# Altium PCB PCB_HCNR201_Linearity Analog Optocouplers.PcbDoc
Units mil, origin at the board's own origin, x right, y up, seen from the top; angles counter-clockwise.
Board outline not stored, 2 copper layers (Top Layer, Bottom Layer); 20 components, 0 nets, 76 pads, 6 vias.
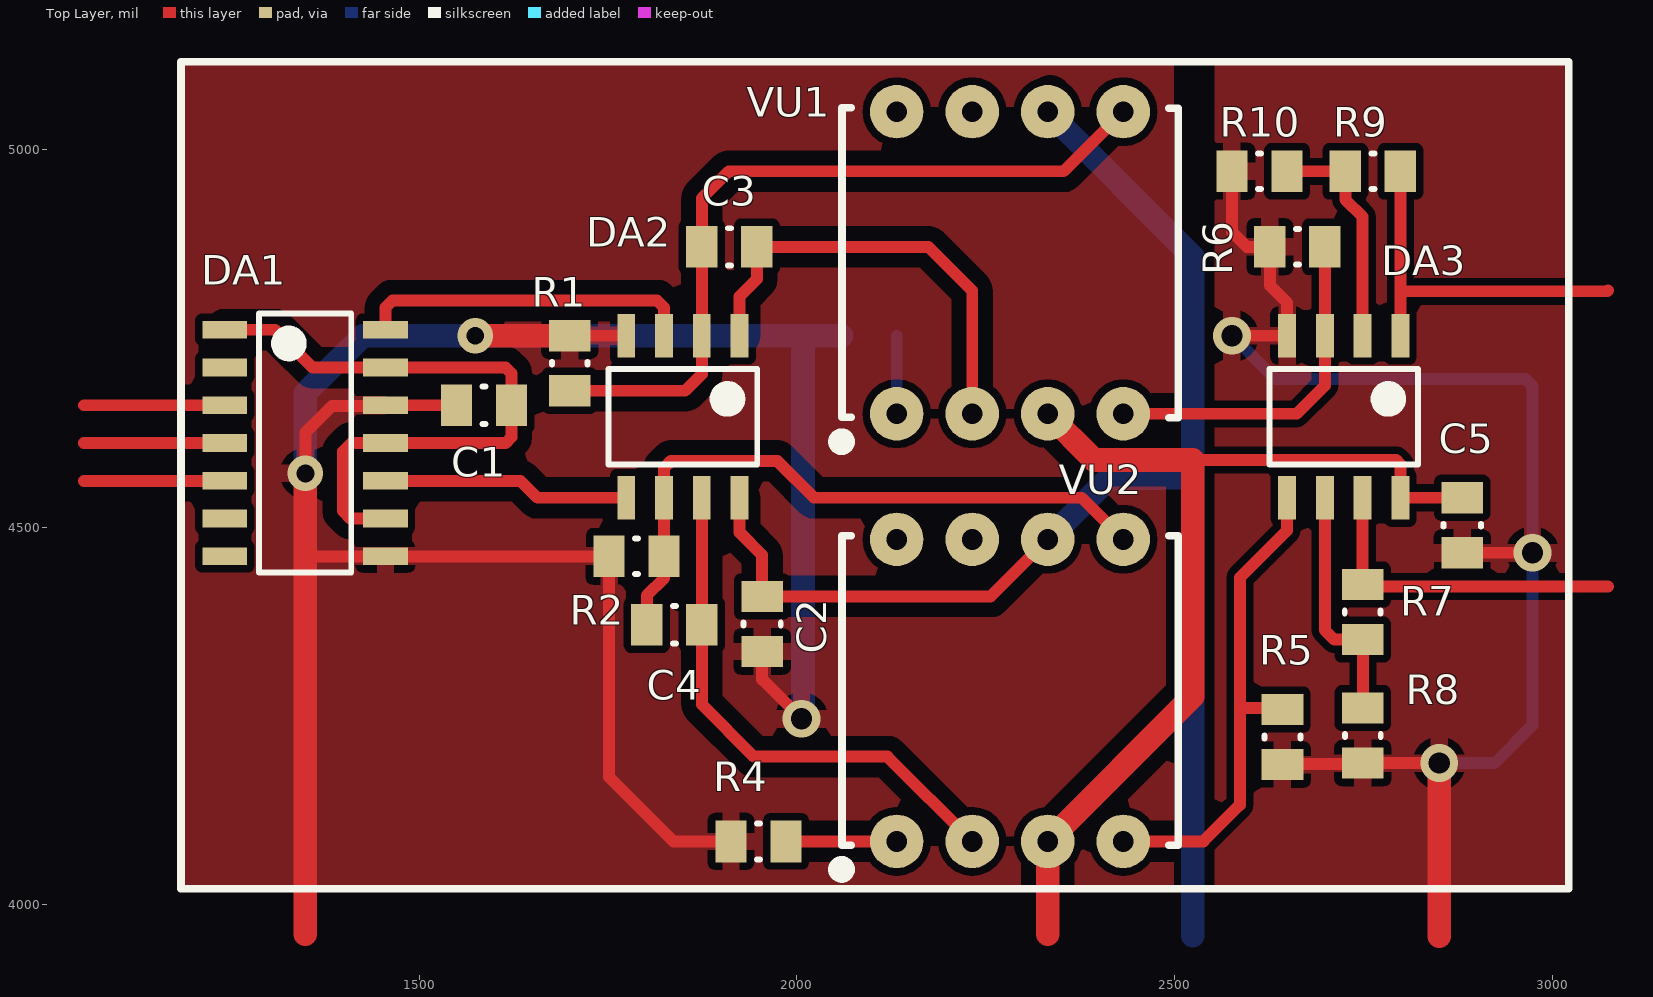
[diagram p0: Top Layer view]
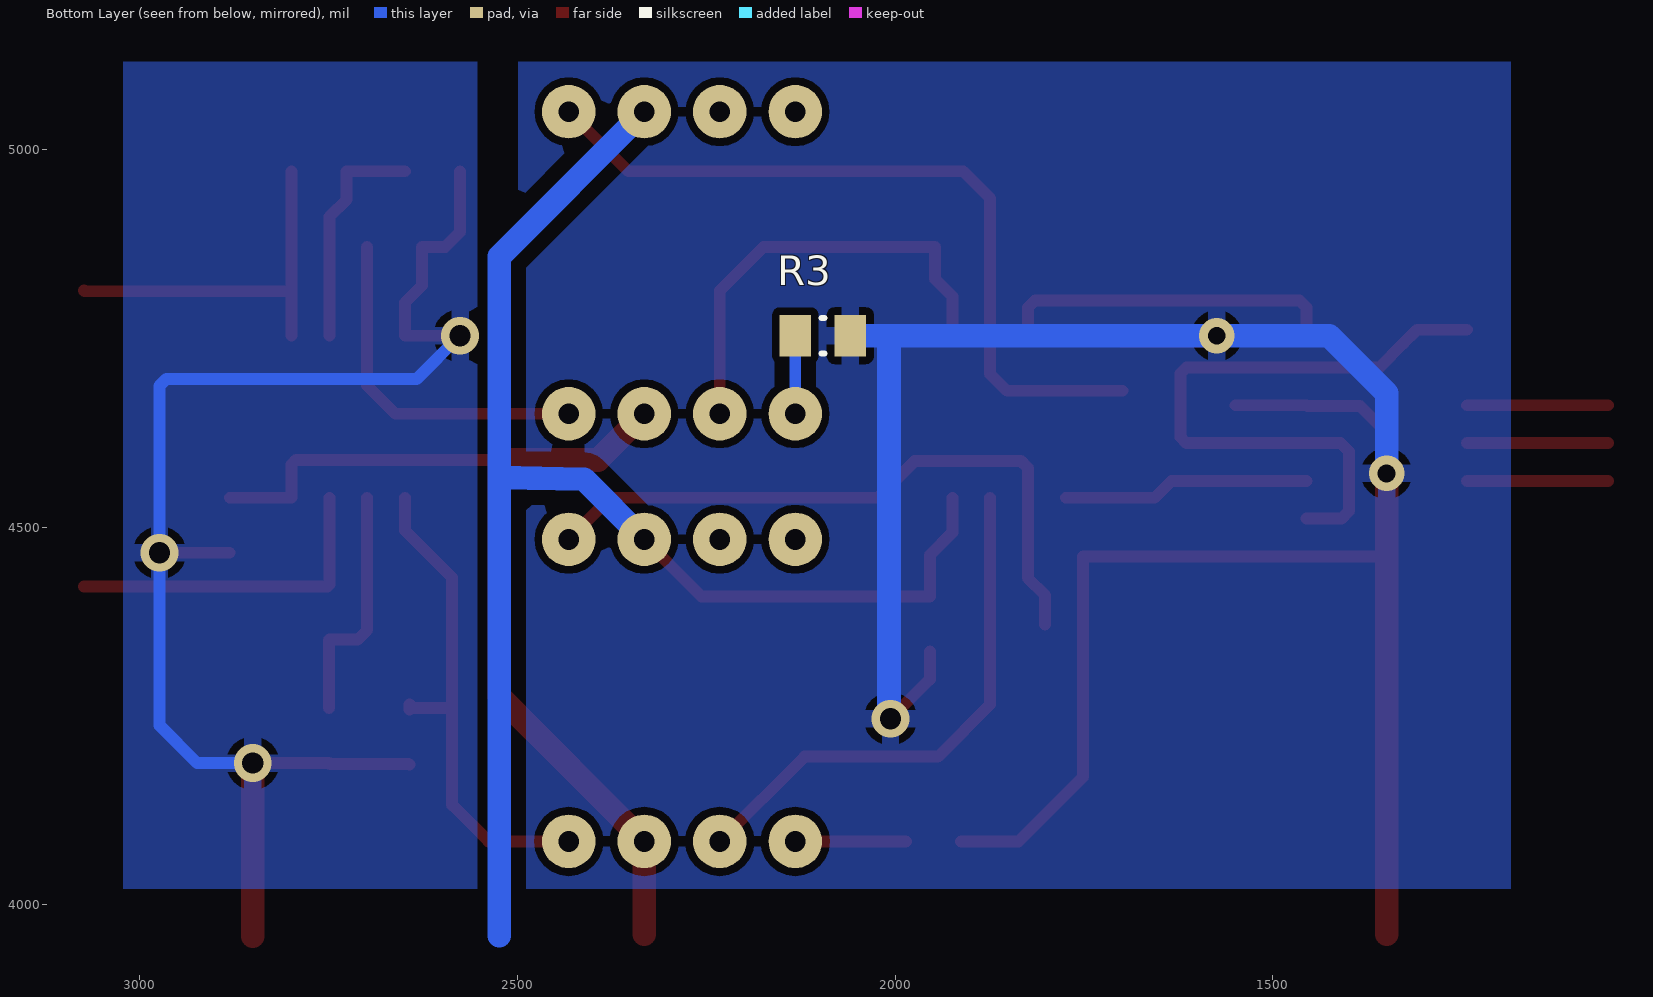
[diagram p1: Bottom Layer view, seen from below]

## Layer stack, top to bottom
Top Solder: solder mask 0.4, Solder Resist, Dk 3.5
Top Layer: signal copper 1.4
Dielectric 1: dielectric 12.6, FR-4, Dk 4.8
Bottom Layer: signal copper 1.4
Bottom Solder: solder mask 0.4, Solder Resist, Dk 3.5

## Components (designator, comment, footprint, x,y, rotation, side; value= is the part's Value field where it differs from the comment)
C1 "100n" CAPACITOR_0805 1585.5,4661.32 r0 top
C2 "100n/35V" CAPACITOR_0805 1953.97,4371.75 r90 top
C3 "100p" CAPACITOR_0805 1910.5,4871.16 r180 top
C4 "100p" CAPACITOR_0805 1837.66,4370.77 r180 top
C5 "100n/35V" CAPACITOR_0805 2880.97,4502.46 r90 top
DA1 "MCP4922" MCP4922_SOIC14 1348.88,4611.32 r0 top
DA2 "TL052CD" AD823_SOIC8 1849.08,4646.16 r270 top
DA3 "TL052CD" AD823_SOIC8 2724.08,4646.16 r270 top
R1 "30k" RESISTOR_SMD0805 1699.08,4717.03 r90 top
R2 "30k" RESISTOR_SMD0805 1787.66,4461.32 r180 top
R3 "100" RESISTOR_SMD0805 2095.73,4753.44 r0 bottom
R4 "100" RESISTOR_SMD0805 1949.08,4083.76 r0 top
R5 "30k" RESISTOR_SMD0805 2642.98,4221.95 r90 top
R6 "30k" RESISTOR_SMD0805 2662.66,4871.16 r0 top
R7 "800, 1%" RESISTOR_SMD0805 2749.08,4387.5 r270 top
R8 "910, 1%" RESISTOR_SMD0805 2749.47,4223.92 r270 top
R9 "800, 1%" RESISTOR_SMD0805 2762.66,4971.16 r0 top
R10 "910, 1%" RESISTOR_SMD0805 2612.66,4971.16 r180 top
VU1 "HCNR201" "DIP-8 WIDEBODY" 2132.15,4650.1 r0 top
VU2 "HCNR201" "DIP-8 WIDEBODY" 2132.15,4083.76 r0 top

## Footprints (in the part's own frame and the unit in brackets; to place one, negate y for a bottom-side part, rotate by r counter-clockwise, add the part's x,y. Pads: shape width x height; smd on the part's side, far side on the other; paste and mask are expansions set on the pad)
AD823_SOIC8 [mm]
  rect 1.45x0.6 smd: 1(-2.725,1.905) 2(-2.725,0.635) 3(-2.725,-0.635) 4(-2.725,-1.905) 5(2.725,-1.905) 6(2.725,-0.635) 7(2.725,0.635) 8(2.725,1.905)
  silkscreen extent -1.6,-2.5 1.6,2.5, body extent -3.1,-2.5 3.1,2.5, height 1.76
CAPACITOR_0805 [mm]
  rect 1.05x1.4 smd: 1(-0.925,0) 2(0.925,0)
  silkscreen extent -0.05,-0.63 0.05,0.63, body extent -1,-0.63 1,0.63, height 1.3
"DIP-8 WIDEBODY" [mm]
  round 1.8 hole 0.7: 1(0,0) 2(2.54,0) 3(5.08,0) 4(7.62,0) 5(7.62,10.16) 6(5.08,10.16) 7(2.54,10.16) 8(0,10.16)
  silkscreen extent -2.05,-1.14 9.47,10.29, body extent -1.84,-0.12 9.46,10.29, height 5.2
MCP4922_SOIC14 [mm]
  rect 1.5x0.6 smd: 1(-2.7,3.81) 2(-2.7,2.54) 3(-2.7,1.27) 4(-2.7,0) 5(-2.7,-1.27) 6(-2.7,-2.54) 7(-2.7,-3.81) 8(2.7,-3.81) 9(2.7,-2.54) 10(2.7,-1.27) 11(2.7,0) 12(2.7,1.27) 13(2.7,2.54) 14(2.7,3.81)
  silkscreen extent -1.55,-4.35 1.55,4.35, body extent -3,-4.44 3,4.45, height 1.7
RESISTOR_SMD0805 [mm]
  rect 1.05x1.4 smd: 1(-0.925,0) 2(0.925,0)
  silkscreen extent -0.05,-0.6 0.05,0.6, body extent -1.1,-0.7 1.1,0.7, height 0.5

## Part data
C1 C3 C4: library part Capacitor_0805
C2 C5: library part Capacitor
DA1: "MCP4922-E/SL"
R1 R2 R3 R4 R5 R6 R7 R8 R9 R10: library part Resistor_0805

## Via types
v1: diameter 50, hole 28, Top Layer to Bottom Layer, 4 vias
v2: diameter 47.24, hole 23.62, Top Layer to Bottom Layer, 2 vias

## Nets (pads, with @x,y where several pads share a name; then routed paths per layer and width w, separated by ;. In a path a pad name is that pad's centre, name@x,y a point inside that pad or via, vN(x,y) a via of type N, cw(c..) or ccw(c..) an arc to the next point about the centre after c; other vN are vias at no path point)
pads on no net: C1.1 C1.2 C2.1 C2.2 C3.1 C3.2 C4.1 C4.2 C5.1 C5.2 DA1.1 DA1.2 DA1.3 DA1.4 DA1.5 DA1.6 DA1.7 DA1.8 DA1.9 DA1.10 DA1.11 DA1.12 DA1.13 DA1.14 DA2.1 DA2.2 DA2.3 DA2.4 DA2.5 DA2.6 DA2.7 DA2.8 DA3.1 DA3.2 DA3.3 DA3.4 DA3.5 DA3.6 DA3.7 DA3.8 R1.1 R1.2 R2.1 R2.2 R3.1 R3.2 R4.1 R4.2 R5.1 R5.2 R6.1 R6.2 R7.1 R7.2 R8.1 R8.2 R9.1 R9.2 R10.1 R10.2 VU1.1 VU1.2 VU1.3 VU1.4 VU1.5 VU1.6 VU1.7 VU1.8 VU2.1 VU2.2 VU2.3 VU2.4 VU2.5 VU2.6 VU2.7 VU2.8
copper on no net: | length 16997.2
  Top Layer w15.75: 1055.95,4561.32 1204.2,4561.32 1242.58,4561.32 ; 1055.95,4611.32 1224.08,4611.32 1242.58,4611.32 ; 1055.95,4661.32 1242.58,4661.32 ; 1242.58,4761.32 1308.92,4761.32 1327.03,4743.21 1327.23,4743.21 1359.12,4711.32 1455.18,4711.32 1614.24,4711.32 1621.91,4703.64 1621.91,4661.32 1621.91,4619 1614.24,4611.32 1455.18,4611.32 1409.91,4611.32 1399.08,4600.49 1399.08,4521.16 1408.92,4511.32 1455.18,4511.32 ; 1349.08,4461.32 1455.18,4461.32 1751.24,4461.32 1751.24,4169 1836.48,4083.76 1912.66,4083.76 ; v2(1349.08,4571.16) 1349.08,4625.1 1384.15,4660.17 1454.03,4660.17 1455.18,4661.32 1549.08,4661.32 ; 1455.18,4561.32 1633.92,4561.32 1656.36,4538.88 1774.08,4538.88 ; 1455.18,4761.32 1455.18,4790.64 1464.41,4799.86 1814.85,4799.86 1824.08,4790.64 1824.08,4753.44 1820.14,4757.38 ; 1699.08,4680.61 1852.03,4680.61 1874.08,4702.66 1874.08,4753.44 1874.08,4871.16 1874.08,4935.53 1909.71,4971.16 2353.21,4971.16 2432.15,5050.1 ; 1699.08,4753.44 1774.08,4753.44 ; 1801.24,4370.77 1801.24,4409.58 1824.08,4432.42 1824.08,4461.32 1824.08,4538.88 1824.08,4578.34 1833.3,4587.57 1974.08,4587.57 2022.77,4538.88 2377.03,4538.88 2432.15,4483.76 ; 1874.08,4538.88 1874.08,4370.77 1874.08,4265.22 1943.13,4196.16 2119.75,4196.16 2232.15,4083.76 ; 1924.08,4538.88 1924.08,4492.89 1953.97,4463 1953.97,4408.17 2256.56,4408.17 2332.15,4483.76 ; 1924.08,4753.44 1924.08,4805.61 1946.91,4828.44 1946.91,4871.16 2174.08,4871.16 2232.15,4813.09 2232.15,4650.1 ; 1953.97,4335.33 1953.97,4298.36 v1(2006.17,4246.16) ; 1985.5,4083.76 1992.39,4083.76 2132.15,4083.76 ; 2324.08,5058.17 2332.15,5050.1 2332.15,5067.79 2335.52,5071.16 ; 2432.15,4083.76 2538.15,4083.76 2586.58,4132.19 2586.58,4260.33 ; 2432.15,4650.1 2661.87,4650.1 2699.08,4687.3 2699.08,4753.44 2699.08,4871.16 ; 2524.08,4588.92 2793.33,4588.92 2799.08,4583.17 2799.08,4538.88 2880.97,4538.88 ; v1(2576.24,4753.44) 2649.08,4753.44 2649.08,4797.15 2626.24,4819.98 2626.24,4871.16 2595.73,4871.16 2576.24,4890.65 2576.24,4971.16 ; 2642.98,4185.53 2643.96,4186.52 2748.49,4186.52 2749.47,4187.5 v1(2850.52,4187.5) ; 2642.98,4258.37 2642.98,4265.26 2638.06,4260.33 2586.58,4260.33 ; 2649.08,4538.88 2649.08,4495.57 2586.58,4433.07 2586.58,4260.33 ; 2649.08,4971.16 2726.24,4971.16 2726.24,4933.76 2749.08,4910.93 2749.08,4753.44 ; 2699.08,4538.88 2699.08,4363.68 2711.68,4351.08 2749.08,4351.08 2749.47,4350.69 2749.47,4260.33 ; 2749.08,4538.88 2749.08,4423.92 2751.83,4421.16 3074.08,4421.16 ; 2799.08,4753.44 2799.08,4812.3 ; 2799.08,4971.16 2799.08,4812.3 ; 2880.97,4466.04 v1(2974.08,4466.04) v1@2974.08,4483.52 ; 3074.08,4813.09 3073.29,4812.3 2799.08,4812.3
  Top Layer w31.5: 1349.08,3960.86 1349.08,4461.32 v2(1349.08,4571.16) ; v2(1574.08,4753.44) 1699.08,4753.44 ; 2332.15,3960.86 2332.15,4083.76 2524.08,4275.69 2524.08,4588.92 2393.33,4588.92 2332.15,4650.1 ; 2850.52,3958.31 v1(2850.52,4187.5)
  Bottom Layer w15.75: 2132.15,4650.1 2132.15,4753.44 ; v1(2576.24,4753.44) 2633.53,4696.16 2964.85,4696.16 2974.08,4686.94 v1(2974.08,4466.04) 2974.08,4237.5 2924.08,4187.5 v1(2850.52,4187.5)
  Bottom Layer w31.5: v2(1349.08,4571.16) 1349.08,4677.32 1425.2,4753.44 v2(1574.08,4753.44) 2008.05,4753.44 ; v1(2006.17,4246.16) 2008.05,4248.05 2008.05,4753.44 ; 2059.32,4753.44 2008.05,4753.44 ; 2332.15,4483.76 2411.84,4563.45 2524.08,4565.61 ; 2332.15,5050.1 2524.08,4858.17 2524.08,4565.61 ; 2524.08,3959.03 2524.08,4565.61

## Polygon pours and split planes (outlines as drawn)
no net on Top Layer "GNDI_L01_P022" (solid, pour order 22): 2553.02,5115.94 3021.95,5115.94 3021.95,4021.16 2553.02,4021.16
no net on Top Layer "GND_L01_P021" (solid, pour order 21): 1184.45,5115.94 2499.08,5115.94 2499.08,4021.16 1184.45,4021.16
no net on Bottom Layer "GND_L02_P007" (solid, pour order 7): 1184.45,5115.94 2499.08,5115.94 2499.08,4021.16 1184.45,4021.16
no net on Bottom Layer "GNDI_L02_P010" (solid, pour order 10): 2553.02,5115.94 3021.95,5115.94 3021.95,4021.16 2553.02,4021.16

## Silkscreen, mask and mechanical layers (free items; w line width, h text height)
Top Overlay:
  lines w10: 1184.45,4021.16 3021.95,4021.16 3021.95,5115.94 1184.45,5115.94 1184.45,4021.16